# Altium PCB valix_PCB1.PcbDoc
Units mil, origin at the board's own origin, x right, y up, seen from the top; angles counter-clockwise.
Board outline 4000 x 1500 mil, 5 copper layers (Top Layer, Internal Plane 1, Signal Layer 1, Internal Plane 2, Bottom Layer), stack 37.051 mil thick; 142 components, 151 nets, 790 pads, 24 vias.
Unrouted connection lines stored in the file: 486.
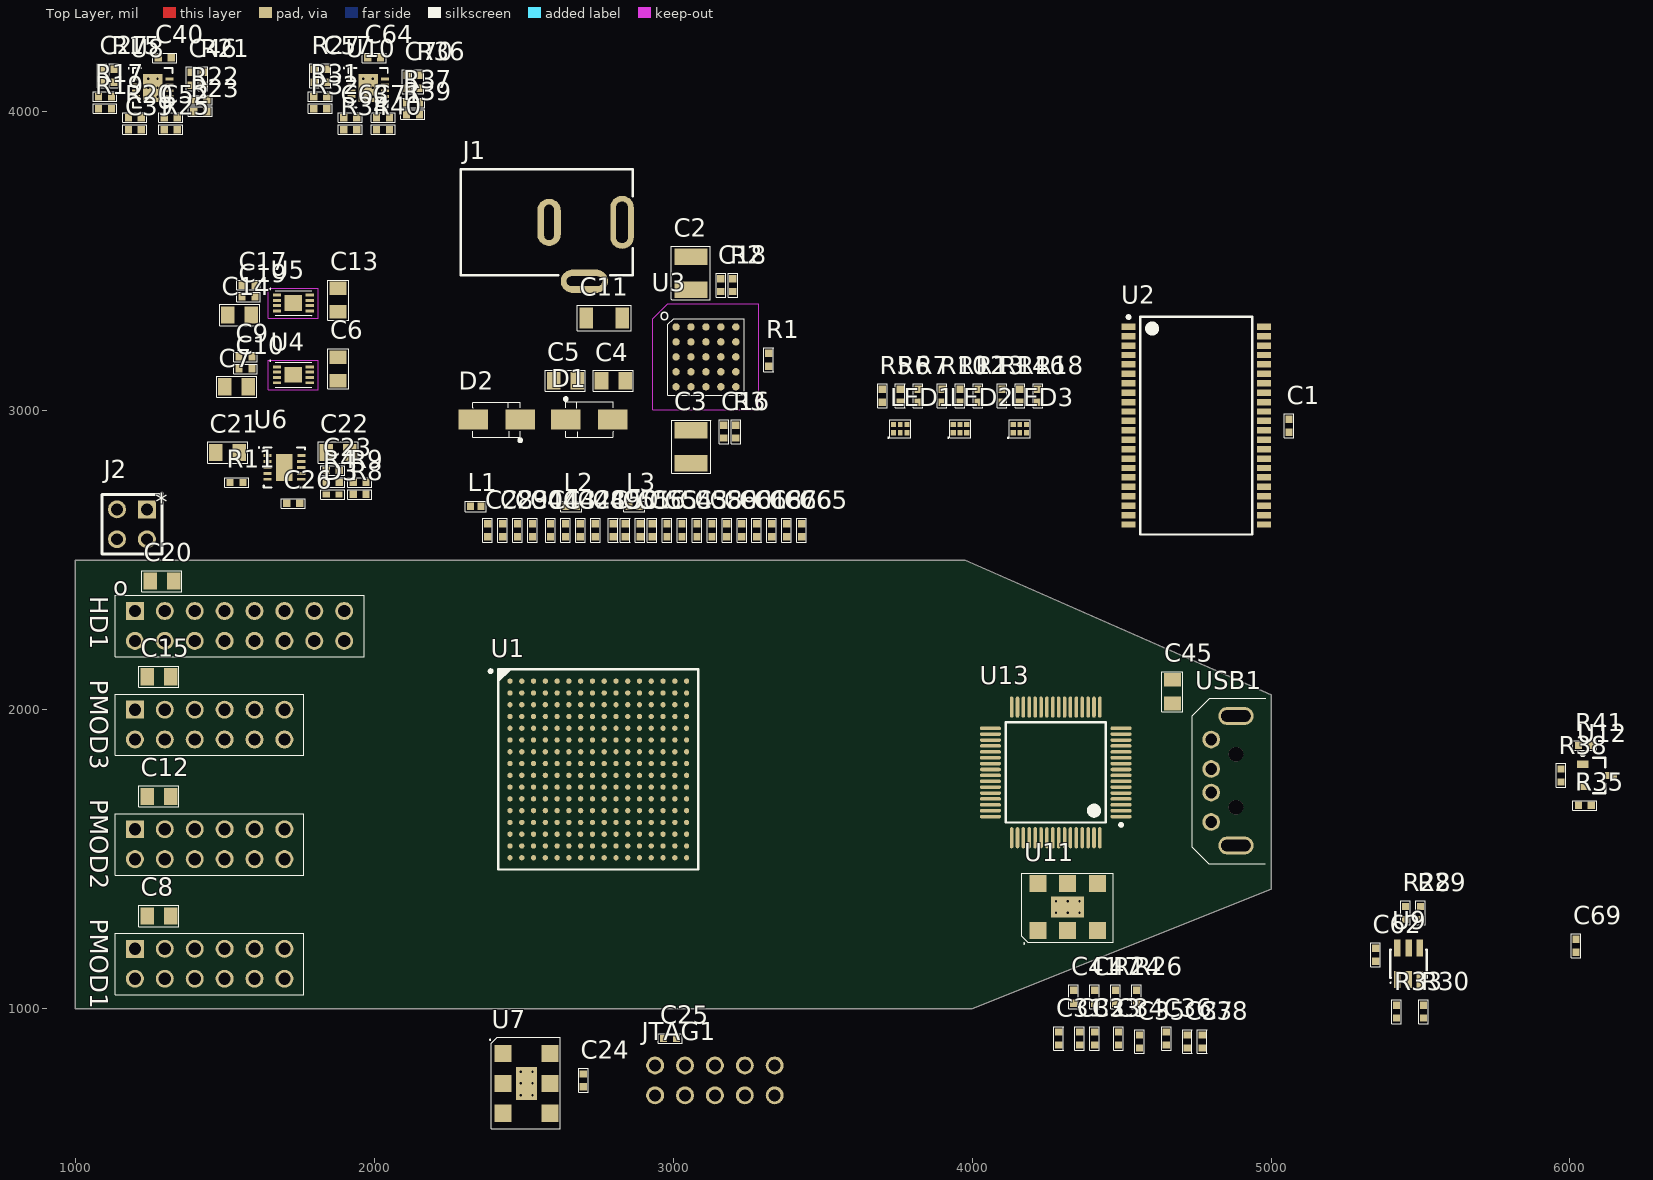
[diagram p0: Top Layer view]
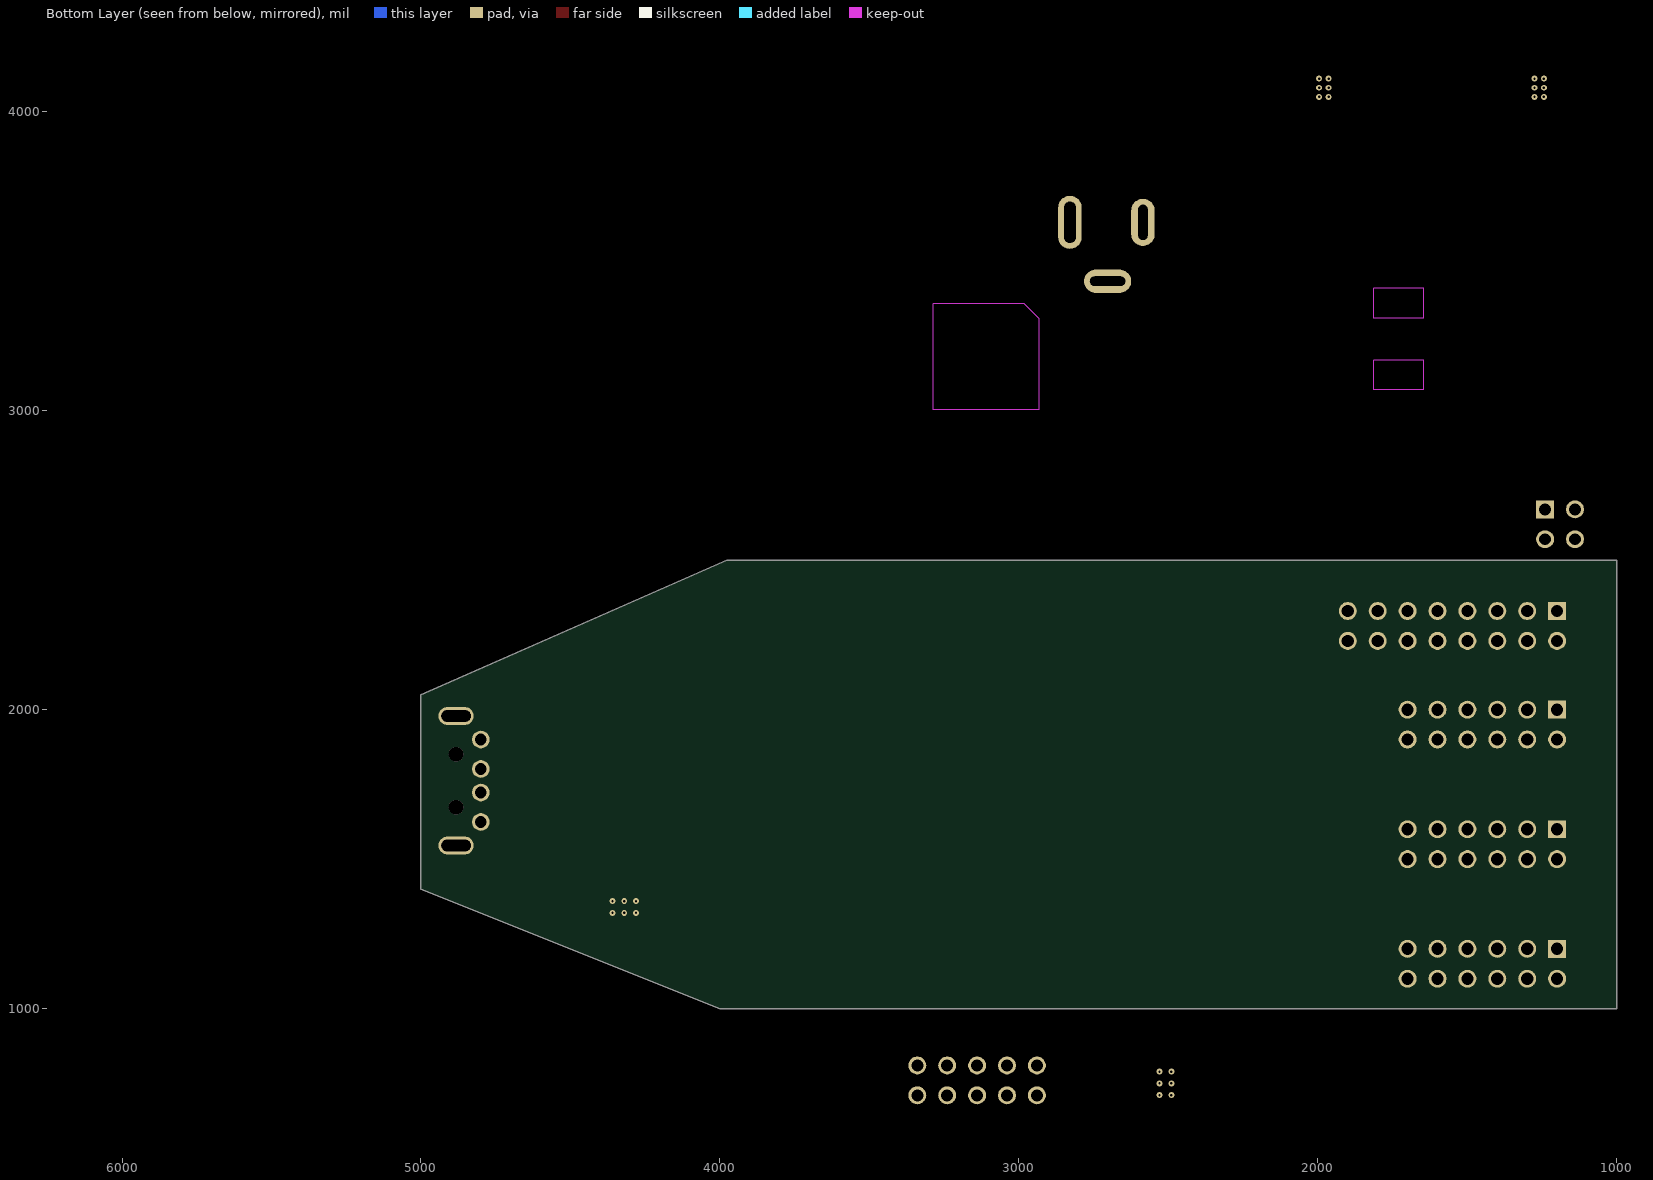
[diagram p1: Bottom Layer view, seen from below]
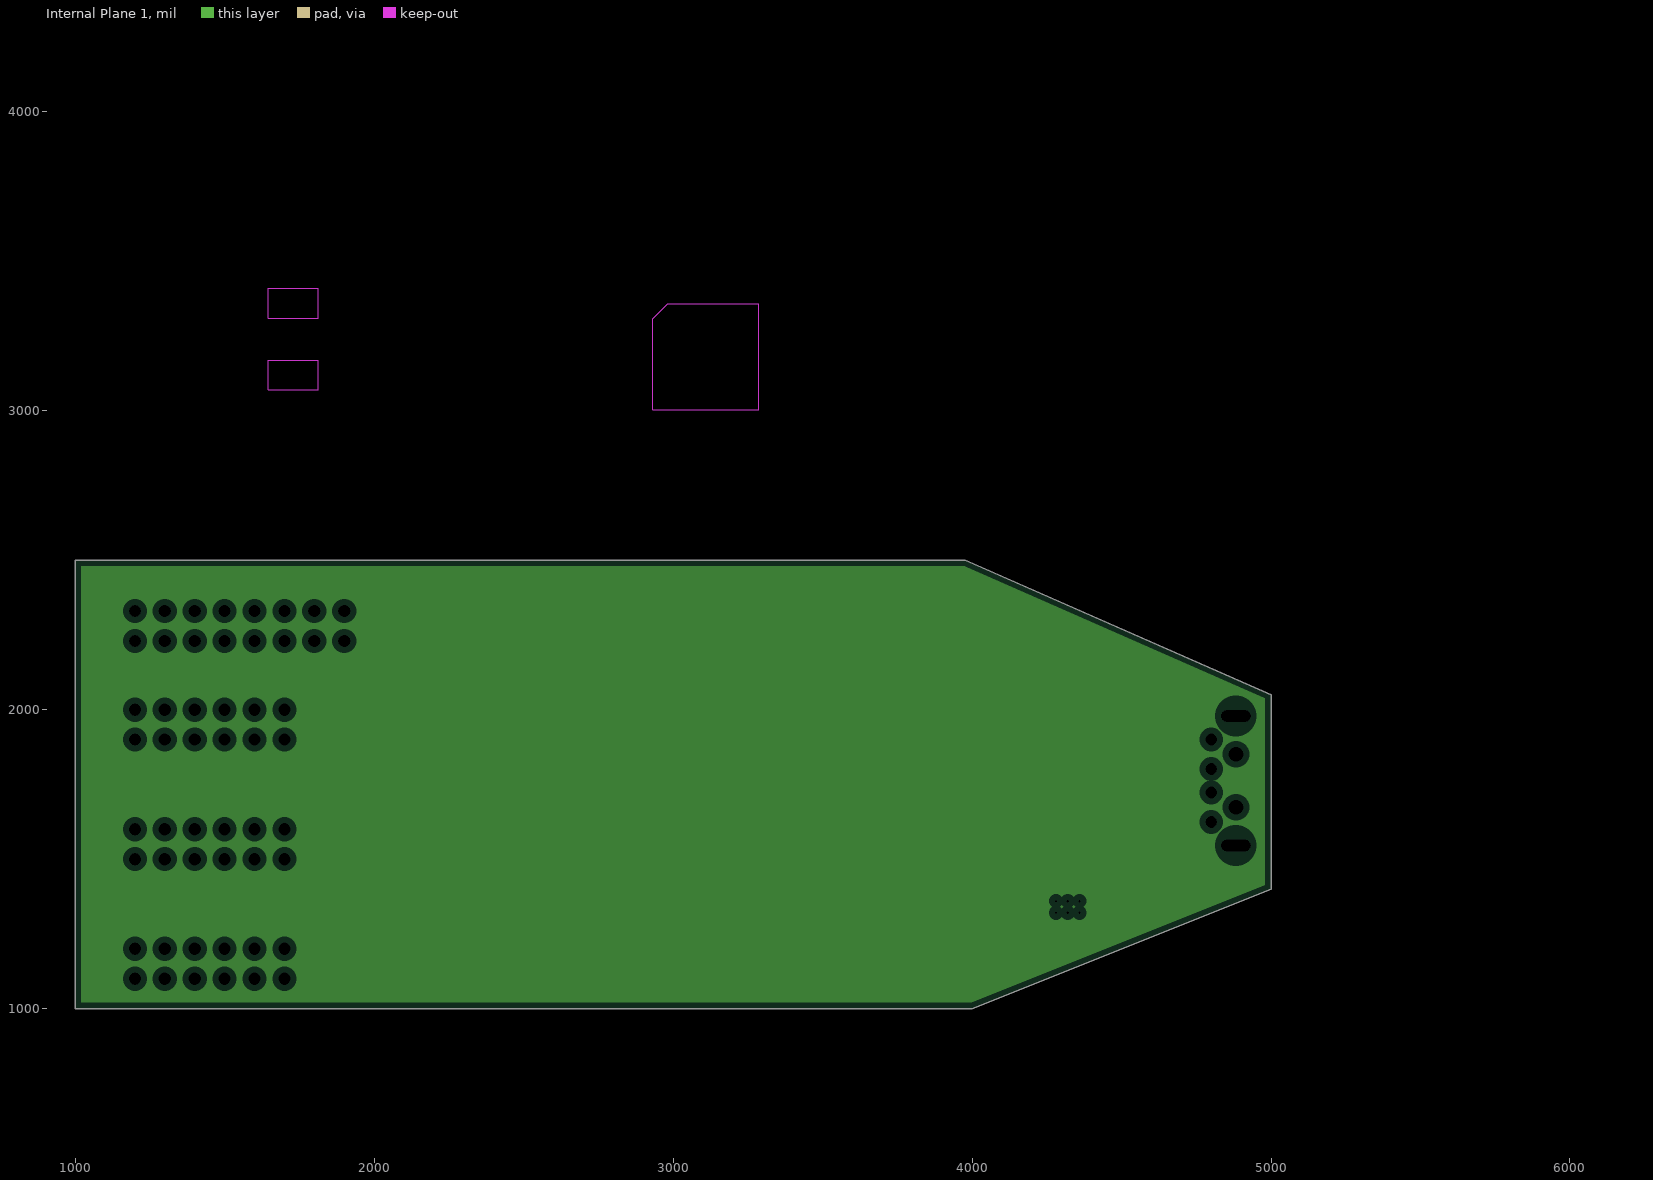
[diagram p2: Internal Plane 1, clearances drawn from the general rule]
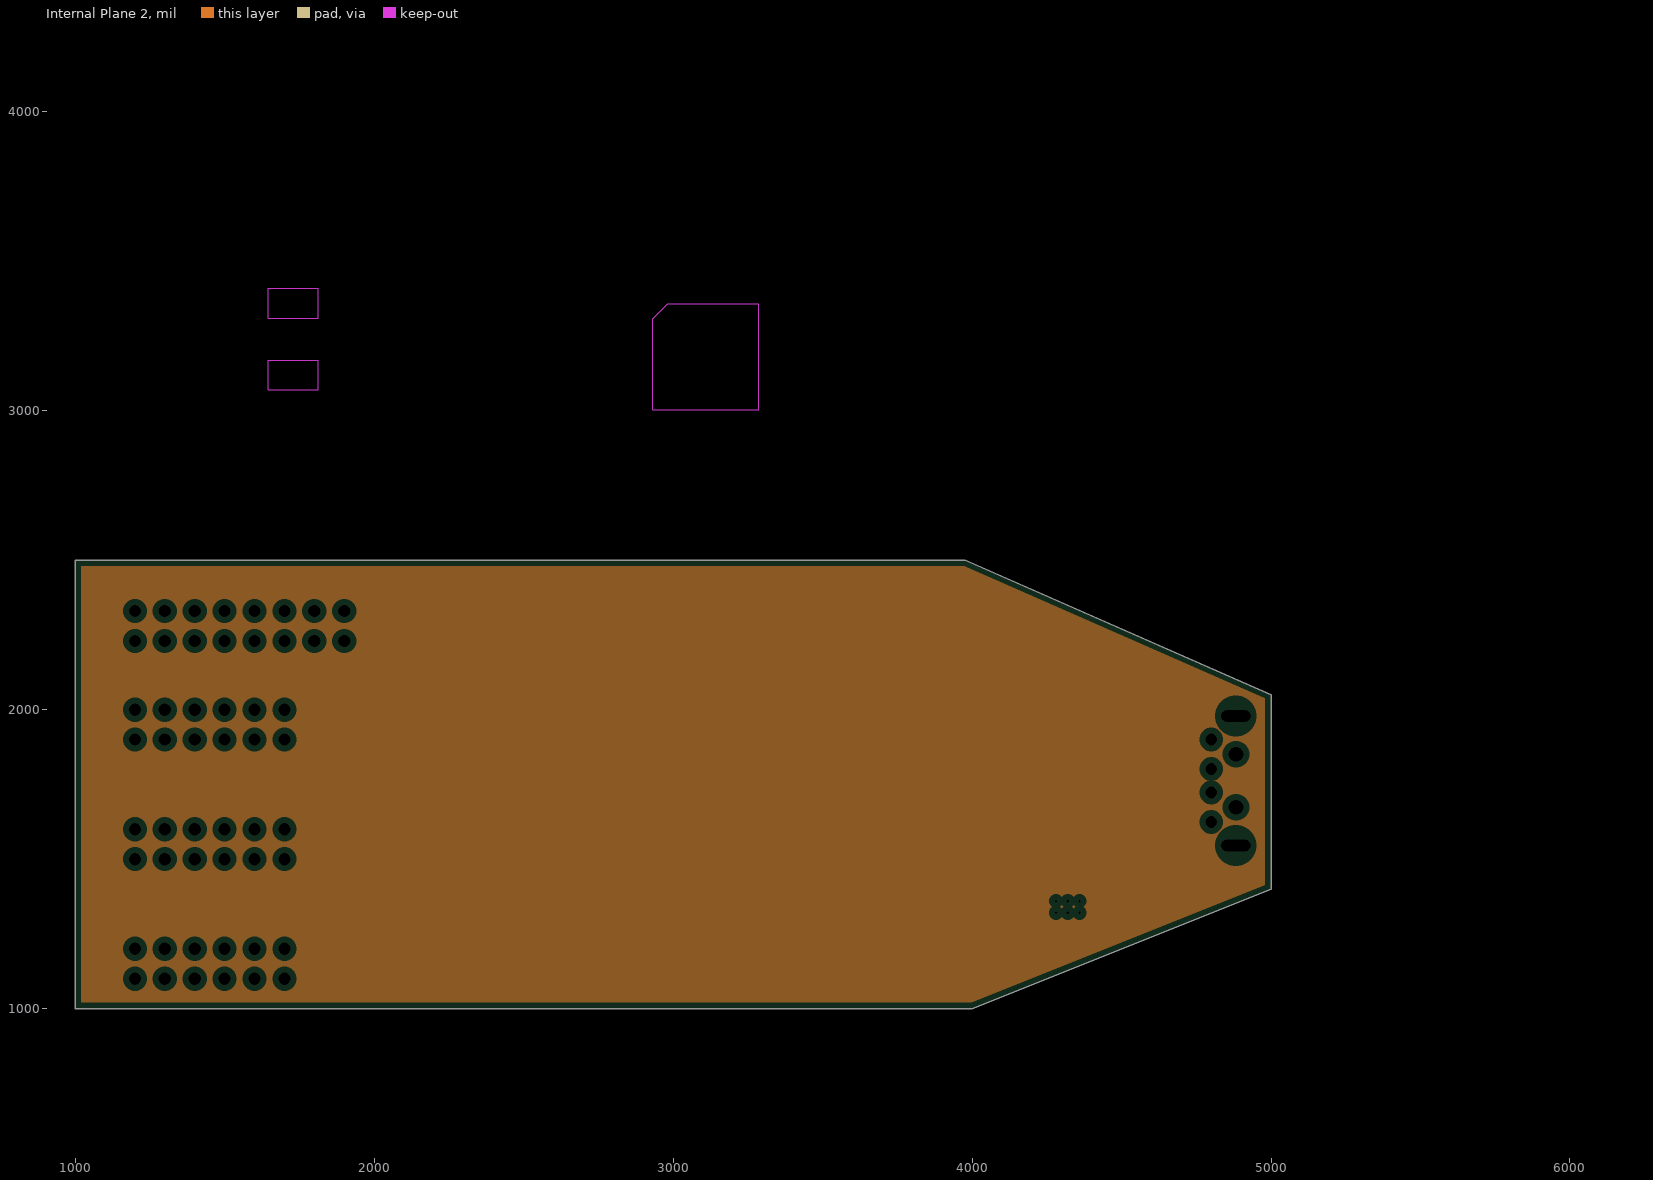
[diagram p3: Internal Plane 2, clearances drawn from the general rule]

## Layer stack, top to bottom
Top Solder: solder mask 0.4, Solder Resist, Dk 3.5
Top Layer: signal copper 1.4
Dielectric 1: core 10, FR-4, Dk 4.2
Internal Plane 1: plane copper 1.417
Dielectric 3: prepreg 5, Dk 4.2
Signal Layer 1: signal copper 1.417
Dielectric 4: core 10, Dk 4.2
Internal Plane 2: plane copper 1.417
Dielectric 2: prepreg 5, Dk 4.2
Bottom Layer: signal copper 1.4
Bottom Solder: solder mask 0.4, Solder Resist, Dk 3.5

## Board outline
1000,1000 1000,2500 3977.27,2500 5000,2050 5000,1400 4000,1000

## Design rules (kind name [scope] priority, off if disabled: settings)
Clearance [All] p1: gap=6
DiffPairsRouting [All] p1: maxlimit=10 minlimit=10 mostfreqgap=10 toplayer_minwidth=15 toplayer_maxwidth=15 toplayer_prefwidth=15 midlayer1_minwidth=15 midlayer1_maxwidth=15 midlayer1_prefwidth=15 bottomlayer_minwidth=15 bottomlayer_maxwidth=15 bottomlayer_prefwidth=15 maxuncoupledlength=500
PlaneClearance [All] p1: clearance=20
PlaneConnect [All] p1: planeconnectstyle=Relief reliefexpansion=20 reliefentries=4 reliefconductorwidth=10 reliefairgap=10
PolygonConnect [All] p1: connectstyle=Relief reliefconductorwidth=10 reliefentries=4 polygonreliefangle="90 Angle" airgapwidth=10
RoomDefinition VALIX_Font14 [InComponentClass('VALIX_Font14')] p1: confinementstyle=ConfineOut formatcopy=TRUE lockcomponents=FALSE outline 5640,2490 6350,2490 6350,4290 5640,4290
RoutingVias [All] p1: holewidth=28 width=50 viastyle="Through Hole" minholewidth=28 minwidth=50 maxholewidth=28 maxwidth=50
SolderMaskExpansion [All] p1: expansion=4
Width [All] p1: maxlimit=10 minlimit=10 preferedwidth=10
27 further rules are at their usual default settings.

## Classes and differential pairs
differential pair USB: +USB_P -USB_N

## Components (designator, comment, footprint, x,y, rotation, side; value= is the part's Value field where it differs from the comment)
C1 "Cap 1.0uF 6.3V 0402 X7R" CC0402_p56_TLH 5060,2950 r90 top
C2 "Cap 22uF 10V 1210 X7R" CC1210_H1p6_20151019 3060,3460 r90 top
C3 "Cap 22uF 10V 1210 X7R" CC1210_H1p6_20151019 3060,2880 r270 top
C4 "Cap 10uF 10V 0805 X7R" CC0805_p94H_TLH 2800,3100 r180 top
C5 "Cap 10uF 10V 0805 X7R" CC0805_p94H_TLH 2640,3100 r0 top
C6 "Cap 10uF 10V 0805 X7R" CC0805_p94H_TLH 1880,3140 r90 top
C7 "Cap 2.2uF 25V 0805 X7R" CC0805_p94H_TLH 1540,3080 r180 top
C8 "Cap 10uF 10V 0805 X7R" CC0805_p94H_TLH 1280,1310 r0 top
C9 "Cap 0.01uF 50V 0402 X7R" CC0402_p56_TLH 1570,3180 r180 top
C10 "Cap 0.01uF 50V 0402 X7R" CC0402_p56_TLH 1570,3140 r180 top
C11 "Cap 22uF 10V 1206 X7R" C1206 2770,3310 r180 top
C12 "Cap 10uF 10V 0805 X7R" CC0805_p94H_TLH 1280,1710 r0 top
C13 "Cap 10uF 10V 0805 X7R" CC0805_p94H_TLH 1880,3370 r90 top
C14 "Cap 2.2uF 25V 0805 X7R" CC0805_p94H_TLH 1550,3320 r180 top
C15 "Cap 10uF 10V 0805 X7R" CC0805_p94H_TLH 1280,2110 r0 top
C16 "Cap 0.1uF 50V 0402 X7R" CC0402_p56_TLH 3170,2930 r270 top
C17 "Cap 0.01uF 50V 0402 X7R" CC0402_p56_TLH 1580,3420 r180 top
C18 "Cap 0.1uF 50V 0402 X7R" CC0402_p56_TLH 3160,3420 r90 top
C19 "Cap 0.01uF 50V 0402 X7R" CC0402_p56_TLH 1580,3380 r180 top
C20 "Cap 2.2uF 25V 0805 X7R" CC0805_p94H_TLH 1290,2430 r0 top
C21 "Cap 10uF 10V 0805 X7R" CC0805_p94H_TLH 1510,2860 r180 top
C22 "Cap 10uF 10V 0805 X7R" CC0805_p94H_TLH 1880,2860 r0 top
C23 "Cap 0.001uF 50V 0402 X7R" CC0402_p56_TLH 1861.65,2800 r0 top
C24 "Cap 1.0uF 6.3V 0402 X7R" CC0402_p56_TLH 2700,760 r270 top
C25 "Cap 1.0uF 6.3V 0402 X7R" CC0402_p56_TLH 2990,900 r180 top
C26 "Cap 0.01uF 50V 0402 X7R" CC0402_p56_TLH 1730,2690 r180 top
C27 "Cap 47pF 50V 0402 NPO" CC0402_p56_TLH 1090,4120 r90 top
C28 "Cap 1.0uF 6.3V 0402 X7R" CC0402_p56_TLH 2380,2600 r90 top
C29 "Cap 1.0uF 6.3V 0402 X7R" CC0402_p56_TLH 2430,2600 r90 top
C30 "Cap 1.0uF 6.3V 0402 X7R" CC0402_p56_TLH 2480,2600 r90 top
C31 "Cap 1.0uF 6.3V 0402 X7R" CC0402_p56_TLH 4290,900 r90 top
C32 "Cap 1.0uF 6.3V 0402 X7R" CC0402_p56_TLH 4360,900 r90 top
C33 "Cap 1.0uF 6.3V 0402 X7R" CC0402_p56_TLH 4410,900 r90 top
C34 "Cap 1.0uF 6.3V 0402 X7R" CC0402_p56_TLH 4490,900 r90 top
C35 "Cap 1.0uF 6.3V 0402 X7R" CC0402_p56_TLH 4560,890 r90 top
C36 "Cap 1.0uF 6.3V 0402 X7R" CC0402_p56_TLH 4650,900 r90 top
C37 "Cap 1.0uF 6.3V 0402 X7R" CC0402_p56_TLH 4720,890 r90 top
C38 "Cap 1.0uF 6.3V 0402 X7R" CC0402_p56_TLH 4770,890 r90 top
C39 "Cap 47pF 50V 0402 NPO" CC0402_p56_TLH 1200,3940 r0 top
C40 "Cap 1.0uF 6.3V 0402 X7R" CC0402_p56_TLH 1300,4180 r180 top
C41 "Cap 1.0uF 6.3V 0402 X7R" CC0402_p56_TLH 4340,1040 r90 top
C42 "Cap 1.0uF 6.3V 0402 X7R" CC0402_p56_TLH 2640,2600 r90 top
C43 "Cap 1.0uF 6.3V 0402 X7R" CC0402_p56_TLH 2590,2600 r90 top
C44 "Cap 1.0uF 6.3V 0402 X7R" CC0402_p56_TLH 2530,2600 r90 top
C45 "Cap 10uF 10V 0805 X7R" CC0805_p94H_TLH 4670,2060 r90 top
C46 "Cap 47pF 50V 0402 NPO" CC0402_p56_TLH 1388.35,4110 r90 top
C47 "Cap 1.0uF 6.3V 0402 X7R" CC0402_p56_TLH 4410,1040 r90 top
C48 "Cap 1.0uF 6.3V 0402 X7R" CC0402_p56_TLH 2690,2600 r90 top
C49 "Cap 1.0uF 6.3V 0402 X7R" CC0402_p56_TLH 2740,2600 r90 top
C50 "Cap 1.0uF 6.3V 0402 X7R" CC0402_p56_TLH 2800,2600 r90 top
C51 "Cap 1.0uF 6.3V 0402 X7R" CC0402_p56_TLH 2840,2600 r90 top
C52 "Cap 47pF 50V 0402 NPO" CC0402_p56_TLH 1320,3980 r180 top
C53 "Cap 1.0uF 6.3V 0402 X7R" CC0402_p56_TLH 3030,2600 r90 top
C54 "Cap 1.0uF 6.3V 0402 X7R" CC0402_p56_TLH 2980,2600 r90 top
C55 "Cap 1.0uF 6.3V 0402 X7R" CC0402_p56_TLH 2930,2600 r90 top
C56 "Cap 1.0uF 6.3V 0402 X7R" CC0402_p56_TLH 2890,2600 r90 top
C57 "Cap 47pF 50V 0402 NPO" CC0402_p56_TLH 1840,4120 r90 top
C58 "Cap 1.0uF 6.3V 0402 X7R" CC0402_p56_TLH 3080,2600 r90 top
C59 "Cap 1.0uF 6.3V 0402 X7R" CC0402_p56_TLH 3130,2600 r90 top
C60 "Cap 1.0uF 6.3V 0402 X7R" CC0402_p56_TLH 3180,2600 r90 top
C61 "Cap 1.0uF 6.3V 0402 X7R" CC0402_p56_TLH 3230,2600 r90 top
C62 "Cap 1.0uF 6.3V 0402 X7R" CC0402_p56_TLH 5350,1180 r270 top
C63 "Cap 47pF 50V 0402 NPO" CC0402_p56_TLH 1920,3980 r0 top
C64 "Cap 1.0uF 6.3V 0402 X7R" CC0402_p56_TLH 2000,4180 r180 top
C65 "Cap 1.0uF 6.3V 0402 X7R" CC0402_p56_TLH 3430,2600 r90 top
C66 "Cap 1.0uF 6.3V 0402 X7R" CC0402_p56_TLH 3380,2600 r90 top
C67 "Cap 1.0uF 6.3V 0402 X7R" CC0402_p56_TLH 3330,2600 r90 top
C68 "Cap 1.0uF 6.3V 0402 X7R" CC0402_p56_TLH 3280,2600 r90 top
C69 "Cap 1.0uF 6.3V 0402 X7R" CC0402_p56_TLH 6020,1210 r270 top
C70 "Cap 47pF 50V 0402 NPO" CC0402_p56_TLH 2110,4100 r90 top
C71 "Cap 47pF 50V 0402 NPO" CC0402_p56_TLH 2030,3980 r180 top
D1 "Diode 40V 3A" SMA_SOICJ127P600-8N 2720,2970 r0 top
D2 "Diode 40V 3A" SMA_SOICJ127P600-8N 2410,2970 r180 top
D3 "SML-P11MT" "CC0402_p56_TLH - LED" 1861.65,2720 r0 top
HD1 "Conn Recept 8x2x0.1 TH SSW" "Conn Recept 8x2x8p35 0p1PH TH" 1450,2280 r180 top
J1 "Conn PWR 2.0 5A 24V TH Barrel" KLD-0202 2290,3630 r0 top
J2 "Header 2x2 100Pitch" Header_2x2x0p100e 1190,2620 r180 top
JTAG1 "Header 2x5 100Pitch" Header_2x5_100x100 3140,760 r0 top
L1 "FB 0.5A 80mohm 0402" Chip2PinSM127P600-8N_TLH20150921 2340,2680 r0 top
L2 "FB 0.5A 80mohm 0402" Chip2PinSM127P600-8N_TLH20150921 2660,2680 r0 top
L3 "FB 0.5A 80mohm 0402" Chip2PinSM127P600-8N_TLH20150921 2870,2680 r0 top
LED1 "LED RGB" LED_RGB_1p5x1p0x0p2_6pin_SON57P100X256N 3760,2940 r90 top
LED2 "LED RGB" LED_RGB_1p5x1p0x0p2_6pin_SON57P100X256N 3960,2940 r90 top
LED3 "LED RGB" LED_RGB_1p5x1p0x0p2_6pin_SON57P100X256N 4160,2940 r90 top
PMOD1 "Conn Recept 6x2x0.1 TH SSW" "Conn Recept 6x2x8p35 0p1PH TH" 1450,1150 r180 top
PMOD2 "Conn Recept 6x2x0.1 TH SSW" "Conn Recept 6x2x8p35 0p1PH TH" 1450,1550 r180 top
PMOD3 "Conn Recept 6x2x0.1 TH SSW" "Conn Recept 6x2x8p35 0p1PH TH" 1450,1950 r180 top
R1 "324K" CC0402_p56_TLH 3320,3170 r90 top
R2 "60.4K" CC0402_p56_TLH 3200,3420 r90 top
R3 "13.3K" CC0402_p56_TLH 3210,2930 r270 top
R4 "61.9K" CC0402_p56_TLH 1861.65,2760 r0 top
R5 "100" CC0402_p56_TLH 3700,3050 r90 top
R6 "392" CC0402_p56_TLH 3760,3050 r90 top
R7 "100" CC0402_p56_TLH 3820,3050 r90 top
R8 "715" CC0402_p56_TLH 1951.65,2720 r0 top
R9 "280K" CC0402_p56_TLH 1951.65,2760 r0 top
R10 "100" CC0402_p56_TLH 3900,3050 r90 top
R11 "150" CC0402_p56_TLH 1540,2760 r180 top
R12 "392" CC0402_p56_TLH 3960,3050 r90 top
R13 "100" CC0402_p56_TLH 4020,3050 r90 top
R14 "100" CC0402_p56_TLH 4100,3050 r90 top
R15 "1.0K" CC0402_p56_TLH 1130,4120 r90 top
R16 "392" CC0402_p56_TLH 4160,3050 r90 top
R17 "1.0K" CC0402_p56_TLH 1100,4050 r0 top
R18 "100" CC0402_p56_TLH 4220,3050 r90 top
R19 "1.0K" CC0402_p56_TLH 1100,4010 r0 top
R20 "1.0K" CC0402_p56_TLH 1200,3980 r0 top
R21 "1.0K" CC0402_p56_TLH 1428.35,4110 r90 top
R22 "1.0K" CC0402_p56_TLH 1418.35,4040 r180 top
R23 "1.0K" CC0402_p56_TLH 1418.35,4000 r180 top
R24 "2.21K" CC0402_p56_TLH 4480,1040 r90 top
R25 "1.0K" CC0402_p56_TLH 1320,3940 r180 top
R26 "10K" CC0402_p56_TLH 4550,1040 r90 top
R27 "1.0K" CC0402_p56_TLH 1800,4120 r90 top
R28 "10K" CC0402_p56_TLH 5450,1320 r270 top
R29 "10K" CC0402_p56_TLH 5500,1320 r270 top
R30 "10K" CC0402_p56_TLH 5510,990 r90 top
R31 "1.0K" CC0402_p56_TLH 1820,4050 r0 top
R32 "1.0K" CC0402_p56_TLH 1820,4010 r0 top
R33 "2.21K" CC0402_p56_TLH 5420,990 r90 top
R34 "1.0K" CC0402_p56_TLH 1920,3940 r0 top
R35 "150" CC0402_p56_TLH 6050,1680 r180 top
R36 "1.0K" CC0402_p56_TLH 2150,4100 r90 top
R37 "1.0K" CC0402_p56_TLH 2130,4030 r180 top
R38 "100" CC0402_p56_TLH 5970,1780 r90 top
R39 "1.0K" CC0402_p56_TLH 2130,3990 r180 top
R40 "1.0K" CC0402_p56_TLH 2030,3940 r180 top
R41 "12.4k" CC0402_p56_TLH 6050,1880 r0 top
U1 "10M08DA" BGA256C100P16X16_1700X1700X155 2750,1800 r0 top
U2 "MR0A16A" TSOP44_80P1180X120-44N 4750,2950 r0 top
U3 "LTM4622" LGA25C127P5X5_625X625X182_20131105 3110,3180 r0 top
U4 "LT3060EDC-2.5" DFN8_2x3_SON45P300X80_HS-9N 1730,3120 r0 top
U5 "LT3060EDC-1.2" DFN8_2x3_SON45P300X80_HS-9N 1730,3360 r0 top
U6 "LT3065-adj" DFN10_SON50P300X80_HS-11N_TLH_20151107 1700,2810 r0 top
U7 "50MHz" SON254P500X85_HS-7N_Oss 2510,750 r0 top
U8 "LT6014CDD" DFN8_3x3_SON50P300X80_HS-9N_20151201 1260,4080 r0 top
U9 "93LC46B" SO-G6/E2.4 5460,1150 r0 top
U10 "LT6014CDD" DFN8_3x3_SON50P300X80_HS-9N_20151201 1980,4080 r0 top
U11 "25MHz" SON254P500X85_HS-7N_Oss 4320,1340 r90 top
U12 "SPX432" SOT23_SOT95P245X112-3N_20151202 6090,1780 r0 top
U13 "IC FT2232HL-Tray" LQFP-64_N 4280,1790 r180 top
USB1 "Conn USB A TH RT" "Connector USB A 4Pin Plug RT" 4800,1900 r270 top

## Footprints (in the part's own frame and the unit in brackets; to place one, negate y for a bottom-side part, rotate by r counter-clockwise, add the part's x,y. Pads: shape width x height; smd on the part's side, far side on the other; paste and mask are expansions set on the pad)
BGA256C100P16X16_1700X1700X155 [mm] "BGA, 256-Leads, Body 17.00x17.00mmx1.55mm, Pitch 1.00mm"
  round 0.45 smd: A1(-7.5,7.5) A2(-6.5,7.5) A3(-5.5,7.5) A4(-4.5,7.5) A5(-3.5,7.5) A6(-2.5,7.5) A7(-1.5,7.5) A8(-0.5,7.5) A9(0.5,7.5) A10(1.5,7.5) A11(2.5,7.5) A12(3.5,7.5) A13(4.5,7.5) A14(5.5,7.5) A15(6.5,7.5) A16(7.5,7.5) B1(-7.5,6.5) B2(-6.5,6.5) B3(-5.5,6.5) B4(-4.5,6.5) B5(-3.5,6.5) B6(-2.5,6.5) B7(-1.5,6.5) B8(-0.5,6.5) B9(0.5,6.5) B10(1.5,6.5) B11(2.5,6.5) B12(3.5,6.5) B13(4.5,6.5) B14(5.5,6.5) B15(6.5,6.5) B16(7.5,6.5) C1(-7.5,5.5) C2(-6.5,5.5) C3(-5.5,5.5) C4(-4.5,5.5) C5(-3.5,5.5) C6(-2.5,5.5) C7(-1.5,5.5) C8(-0.5,5.5) C9(0.5,5.5) C10(1.5,5.5) C11(2.5,5.5) C12(3.5,5.5) C13(4.5,5.5) C14(5.5,5.5) C15(6.5,5.5) C16(7.5,5.5) D1(-7.5,4.5) D2(-6.5,4.5) D3(-5.5,4.5) D4(-4.5,4.5) D5(-3.5,4.5) D6(-2.5,4.5) D7(-1.5,4.5) D8(-0.5,4.5) D9(0.5,4.5) D10(1.5,4.5) D11(2.5,4.5) D12(3.5,4.5) D13(4.5,4.5) D14(5.5,4.5) D15(6.5,4.5) D16(7.5,4.5) E1(-7.5,3.5) E2(-6.5,3.5) E3(-5.5,3.5) E4(-4.5,3.5) E5(-3.5,3.5) E6(-2.5,3.5) E7(-1.5,3.5) E8(-0.5,3.5) E9(0.5,3.5) E10(1.5,3.5) E11(2.5,3.5) E12(3.5,3.5) E13(4.5,3.5) E14(5.5,3.5) E15(6.5,3.5) E16(7.5,3.5) F1(-7.5,2.5) F2(-6.5,2.5) F3(-5.5,2.5) F4(-4.5,2.5) F5(-3.5,2.5) F6(-2.5,2.5) F7(-1.5,2.5) F8(-0.5,2.5) F9(0.5,2.5) F10(1.5,2.5) F11(2.5,2.5) F12(3.5,2.5) F13(4.5,2.5) F14(5.5,2.5) F15(6.5,2.5) F16(7.5,2.5) G1(-7.5,1.5) G2(-6.5,1.5) G3(-5.5,1.5) G4(-4.5,1.5) G5(-3.5,1.5) G6(-2.5,1.5) G7(-1.5,1.5) G8(-0.5,1.5) G9(0.5,1.5) G10(1.5,1.5) G11(2.5,1.5) G12(3.5,1.5) G13(4.5,1.5) G14(5.5,1.5) G15(6.5,1.5) G16(7.5,1.5) H1(-7.5,0.5) H2(-6.5,0.5) H3(-5.5,0.5) H4(-4.5,0.5) H5(-3.5,0.5) H6(-2.5,0.5) H7(-1.5,0.5) H8(-0.5,0.5) H9(0.5,0.5) H10(1.5,0.5) H11(2.5,0.5) H12(3.5,0.5) H13(4.5,0.5) H14(5.5,0.5) H15(6.5,0.5) H16(7.5,0.5) J1(-7.5,-0.5) J2(-6.5,-0.5) J3(-5.5,-0.5) J4(-4.5,-0.5) J5(-3.5,-0.5) J6(-2.5,-0.5) J7(-1.5,-0.5) J8(-0.5,-0.5) J9(0.5,-0.5) J10(1.5,-0.5) J11(2.5,-0.5) J12(3.5,-0.5) J13(4.5,-0.5) J14(5.5,-0.5) J15(6.5,-0.5) J16(7.5,-0.5) K1(-7.5,-1.5) K2(-6.5,-1.5) K3(-5.5,-1.5) K4(-4.5,-1.5) K5(-3.5,-1.5) K6(-2.5,-1.5) K7(-1.5,-1.5) K8(-0.5,-1.5) K9(0.5,-1.5) K10(1.5,-1.5) K11(2.5,-1.5) K12(3.5,-1.5) K13(4.5,-1.5) K14(5.5,-1.5) K15(6.5,-1.5) K16(7.5,-1.5) L1(-7.5,-2.5) L2(-6.5,-2.5) L3(-5.5,-2.5) L4(-4.5,-2.5) L5(-3.5,-2.5) L6(-2.5,-2.5) L7(-1.5,-2.5) L8(-0.5,-2.5) L9(0.5,-2.5) L10(1.5,-2.5) L11(2.5,-2.5) L12(3.5,-2.5) L13(4.5,-2.5) L14(5.5,-2.5) L15(6.5,-2.5) L16(7.5,-2.5) M1(-7.5,-3.5) M2(-6.5,-3.5) M3(-5.5,-3.5) M4(-4.5,-3.5) M5(-3.5,-3.5) M6(-2.5,-3.5) M7(-1.5,-3.5) M8(-0.5,-3.5) M9(0.5,-3.5) M10(1.5,-3.5) M11(2.5,-3.5) M12(3.5,-3.5) M13(4.5,-3.5) M14(5.5,-3.5) M15(6.5,-3.5) M16(7.5,-3.5) N1(-7.5,-4.5) N2(-6.5,-4.5) N3(-5.5,-4.5) N4(-4.5,-4.5) N5(-3.5,-4.5) N6(-2.5,-4.5) N7(-1.5,-4.5) N8(-0.5,-4.5) N9(0.5,-4.5) N10(1.5,-4.5) N11(2.5,-4.5) N12(3.5,-4.5) N13(4.5,-4.5) N14(5.5,-4.5) N15(6.5,-4.5) N16(7.5,-4.5) P1(-7.5,-5.5) P2(-6.5,-5.5) P3(-5.5,-5.5) P4(-4.5,-5.5) P5(-3.5,-5.5) P6(-2.5,-5.5) P7(-1.5,-5.5) P8(-0.5,-5.5) P9(0.5,-5.5) P10(1.5,-5.5) P11(2.5,-5.5) P12(3.5,-5.5) P13(4.5,-5.5) P14(5.5,-5.5) P15(6.5,-5.5) P16(7.5,-5.5) R1(-7.5,-6.5) R2(-6.5,-6.5) R3(-5.5,-6.5) R4(-4.5,-6.5) R5(-3.5,-6.5) R6(-2.5,-6.5) R7(-1.5,-6.5) R8(-0.5,-6.5) R9(0.5,-6.5) R10(1.5,-6.5) R11(2.5,-6.5) R12(3.5,-6.5) R13(4.5,-6.5) R14(5.5,-6.5) R15(6.5,-6.5) R16(7.5,-6.5) T1(-7.5,-7.5) T2(-6.5,-7.5) T3(-5.5,-7.5) T4(-4.5,-7.5) T5(-3.5,-7.5) T6(-2.5,-7.5) T7(-1.5,-7.5) T8(-0.5,-7.5) T9(0.5,-7.5) T10(1.5,-7.5) T11(2.5,-7.5) T12(3.5,-7.5) T13(4.5,-7.5) T14(5.5,-7.5) T15(6.5,-7.5) T16(7.5,-7.5)
  silkscreen extent -9.27,-8.5 8.5,8.5, body extent -8.5,-8.5 8.5,8.5, height 1.55
C1206 [mm]
  rect 1.15x1.8 smd: 1(-1.524,0) 2(1.524,0)
  silkscreen extent -2.3,-1.1 2.3,1.1, body extent -1.6,-0.8 1.6,0.8, height 0.55
CC0402_p56_TLH [mm] "Chip Capacitor, 2-Leads, Body 1.0x0.50x0.56mm, IPC Low Density"
  rect 0.62x0.62 smd: 1(-0.55,0) 2(0.55,0)
  silkscreen extent -1.02,-0.41 1.02,0.41, body extent -0.55,-0.3 0.55,0.3, height 0.56
"CC0402_p56_TLH - LED" [mm] "LED, 2-Leads, Body 1.0x0.50x0.56mm, IPC Low Density"
  rect 0.6x0.5 smd: 1(-0.55,0) 2(0.55,0)
  silkscreen extent -1.02,-0.41 1.02,0.41, body extent -0.5,-0.25 0.5,0.25, height 0.16
CC0805_p94H_TLH [mm] "Cap 0805 0p94 high"
  rect 1.15x1.45 smd: 1(-1,0) 2(1,0)
  silkscreen extent -1.7,-0.9 1.7,0.9, body extent -1.11,-0.72 1.1,0.72, height 0.94
CC1210_H1p6_20151019 [mm] "CC1210H1.6 Chip2PinSM127P600-8N"
  rect 1.4x2.8 smd: 1(-1.4,0) 2(1.4,0)
  silkscreen extent -2.25,-1.63 2.27,1.68, body extent -1.6,-1.35 1.6,1.35, height 1.7
Chip2PinSM127P600-8N_TLH20150921 [mm] "Chip 0402 inductor"
  rect 0.59x0.62 smd: 1(-0.455,0) 2(0.455,0)
  silkscreen extent -0.9,-0.45 0.9,0.45, body extent -0.53,-0.28 0.53,0.27, height 0.55
"Conn Recept 6x2x8p35 0p1PH TH" [mil] "Conn Recept 6x2x8p35 0p1PH TH Samtec SSW"
  rect 60x60 hole 40.94: 1(250,-50)
  round 60 hole 40.94: 2(250,50) 3(150,-50) 4(150,50) 5(50,-50) 6(50,50) 7(-50,-50) 8(-50,50) 9(-150,-50) 10(-150,50) 11(-250,-50) 12(-250,50)
  silkscreen extent -315,-101 315,103, body extent -310,-97 310,98, height 335
"Conn Recept 8x2x8p35 0p1PH TH" [mil] "Conn Recept 8x2x8p35 0p1PH TH Samtec SSW"
  rect 60x60 hole 40.94: 1(250,-50)
  round 60 hole 40.94: 2(250,50) 3(150,-50) 4(150,50) 5(50,-50) 6(50,50) 7(-50,-50) 8(-50,50) 9(-150,-50) 10(-150,50) 11(-250,-50) 12(-250,50) 13(-350,-50) 14(-350,50) 15(-450,-50) 16(-450,50)
  silkscreen extent -517,-103 315,103, body extent -510,-97 310,98, height 335
"Connector USB A 4Pin Plug RT" [mm] "Connector USB A 4Pin Plug RT"
  round 1.25 hole 1.25 unplated: 0(1.25,2.1) 0(5.75,2.1)
  round 1.5 hole 1: 1(0,0) 2(2.5,0) 3(4.5,0) 4(7,0)
  oval 1.524x3 hole 1 slot 2.5 at 90 deg: G1(-2,2.1) G2(9,2.1)
  silkscreen extent -3.5,-1.6 10.55,4.65, body extent -2.79,-0.11 9.9,19.92, height 4.51
DFN8_2x3_SON45P300X80_HS-9N [mm] "SON, 8-Leads, Body 2.00x3.00mm, Pitch 0.45mm, Thermal Pad 2.38x1.49mm, IPC Medium Density"
  rect 0.7x0.25 smd: 1(-1.4,0.675) 2(-1.4,0.225) 3(-1.4,-0.225) 4(-1.4,-0.675) 5(1.4,-0.675) 6(1.4,-0.225) 7(1.4,0.225) 8(1.4,0.675)
  rect 1.5x1.35 smd: 9(0,0)
  Keep-Out Layer lines w0.05: -2.15,-1.275 -2.15,1.25 2.125,1.25 2.125,-1.275 -2.15,-1.275
  silkscreen extent -2,-1.07 1.55,1.25, body extent -1.55,-1.05 1.55,1.05, height 0.8
DFN8_3x3_SON50P300X80_HS-9N_20151201 [mm] "SON, 8-Leads, Body 3.00x3.00mm, Pitch 0.50mm, Thermal Pad 2.80x1.80mm, IPC Medium Density"
  rect 0.675x0.25 smd: 1(-1.425,0.75) 2(-1.425,0.25) 3(-1.425,-0.25) 4(-1.425,-0.75) 5(1.425,-0.75) 6(1.425,-0.25) 7(1.425,0.25) 8(1.425,0.75)
  rect 1.65x2.38 smd: 9(0,0)
  silkscreen extent -2.1,-1.67 1.67,1.72, body extent -1.55,-1.55 1.55,1.55, height 0.79
DFN10_SON50P300X80_HS-11N_TLH_20151107 [mm] "SON, 10-Leads, Body 3.00x3.00mm, Pitch 0.50mm, Thermal Pad 2.38x1.49mm, IPC Medium Density"
  rect 0.7x0.25 smd: 1(-1.425,1) 2(-1.425,0.5) 3(-1.425,0) 4(-1.425,-0.5) 5(-1.425,-1) 6(1.425,-1) 7(1.425,-0.5) 8(1.425,0) 9(1.425,0.5) 10(1.45,1)
  rect 1.4x2.3 smd: 11(0,0)
  silkscreen extent -2.2,-1.7 1.75,1.75, body extent -1.6,-1.55 1.5,1.55, height 0.8
Header_2x2x0p100e [mil] "Header 2x2x100mil Samtec TSW standard"
  rect 60x60 hole 40: 1(-50,-50)
  round 60 hole 40: 2(-50,50) 3(50,-50) 4(50,50)
  silkscreen extent -100,-105 100,100, body extent -100,-100 100,100, height 374
Header_2x5_100x100 [mil] "Header 2x5 100x100 Samtec TSW standard"
  round 60 hole 40: 1(-200,-50) 2(-200,50) 3(-100,-50) 4(-100,50) 5(0,-50) 6(0,50) 7(100,-50) 8(100,50) 9(200,-50) 10(200,50)
  body extent -250,-100 250,100, height 621
KLD-0202 [mm] "DC Power Jack, 2.5mm, KLD Series, PCB Mount"
  oval 2x4.5 hole 1 slot 3.5 at 90 deg: 1(13.7,0)
  oval 2x4 hole 0.8 slot 3 at 90 deg: 2(7.5,0)
  oval 4x2 hole 0.8 slot 3 at 0 deg: 3(10.5,-5)
  silkscreen extent 0,-4.5 14.6,4.5, body extent -0.1,-5.28 14.35,4.27, height 11
LED_RGB_1p5x1p0x0p2_6pin_SON57P100X256N [mm] "SON, 6-Leads, Body 1.50x1.00mm, Pitch 0.57mm, IPC Medium Density"
  rect 0.45x0.45 smd: 1(-0.35,0.57) 3(-0.35,-0.57) 4(0.35,-0.57) 6(0.35,0.57)
  rect 0.45x0.4 smd: 2(-0.35,0) 5(0.35,0)
  silkscreen extent -0.84,-0.89 0.76,1.06, body extent -0.53,-0.76 0.53,0.75, height 0.25
LGA25C127P5X5_625X625X182_20131105 [mm] "LGA, 25-Leads, Body 6.25x6.25mmx1.82mm, Pitch 1.27mm"
  round 0.63 smd: A1(-2.54,2.54) A2(-1.27,2.54) A3(0,2.54) A4(1.27,2.54) A5(2.54,2.54) B1(-2.54,1.27) B2(-1.27,1.27) B3(0,1.27) B4(1.27,1.27) B5(2.54,1.27) C1(-2.54,0) C2(-1.27,0) C3(0,0) C4(1.27,0) C5(2.54,0) D1(-2.54,-1.27) D2(-1.27,-1.27) D3(0,-1.27) D4(1.27,-1.27) D5(2.54,-1.27) E1(-2.54,-2.54) E2(-1.27,-2.54) E3(0,-2.54) E4(1.27,-2.54) E5(2.54,-2.54)
  Keep-Out Layer lines w0.1: -4.5,-4.5 -4.5,3.25 -3.25,4.5 4.5,4.5 4.5,-4.5 3.25,-4.5 -4.5,-4.5
  silkscreen extent -3.25,-3.25 3.25,3.25, body extent -3.13,-3.13 3.13,3.13, height 1.82
LQFP-64_N [mm] "Thin QFP, 64-Leads, Body 10x10mm, Pitch 0.5mm, IPC Medium Density"
  oval 1.8x0.3 smd: 1(-5.55,3.75) 2(-5.55,3.25) 3(-5.55,2.75) 4(-5.55,2.25) 5(-5.55,1.75) 6(-5.55,1.25) 7(-5.55,0.75) 8(-5.55,0.25) 9(-5.55,-0.25) 10(-5.55,-0.75) 11(-5.55,-1.25) 12(-5.55,-1.75) 13(-5.55,-2.25) 14(-5.55,-2.75) 15(-5.55,-3.25) 16(-5.55,-3.75) 33(5.55,-3.75) 34(5.55,-3.25) 35(5.55,-2.75) 36(5.55,-2.25) 37(5.55,-1.75) 38(5.55,-1.25) 39(5.55,-0.75) 40(5.55,-0.25) 41(5.55,0.25) 42(5.55,0.75) 43(5.55,1.25) 44(5.55,1.75) 45(5.55,2.25) 46(5.55,2.75) 47(5.55,3.25) 48(5.55,3.75)
  oval 0.3x1.8 smd: 17(-3.75,-5.55) 18(-3.25,-5.55) 19(-2.75,-5.55) 20(-2.25,-5.55) 21(-1.75,-5.55) 22(-1.25,-5.55) 23(-0.75,-5.55) 24(-0.25,-5.55) 25(0.25,-5.55) 26(0.75,-5.55) 27(1.25,-5.55) 28(1.75,-5.55) 29(2.25,-5.55) 30(2.75,-5.55) 31(3.25,-5.55) 32(3.75,-5.55) 49(3.75,5.55) 50(3.25,5.55) 51(2.75,5.55) 52(2.25,5.55) 53(1.75,5.55) 54(1.25,5.55) 55(0.75,5.55) 56(0.25,5.55) 57(-0.25,5.55) 58(-0.75,5.55) 59(-1.25,5.55) 60(-1.75,5.55) 61(-2.25,5.55) 62(-2.75,5.55) 63(-3.25,5.55) 64(-3.75,5.55)
  silkscreen extent -5.68,-4.25 4.25,4.57, body extent -5,-5 5,5, height 1.6
SMA_SOICJ127P600-8N [mm] "SMA Diode"
  rect 2.5x1.7 smd: 1(-2,0) 2(2,0)
  silkscreen extent -2.12,-1.47 2.02,1.87, body extent -2.53,-1.46 2.75,1.46, height 2.41
SO-G6/E2.4 [mm] "Small Outline; 6 Leads; Body 3.6 x 3.6 mm, inc. leads (LxW max)"
  rect 0.55x1.45 smd: 1(-0.95,-1.35) 2(0,-1.35) 3(0.95,-1.35) 4(0.95,1.35) 5(0,1.35) 6(-0.95,1.35)
  silkscreen extent -1.57,-1.65 1.55,1.2, body extent -1.46,-1.62 1.46,1.22, height 1.12
SON254P500X85_HS-7N_Oss [mm] "SON, 6-Leads, Body 7.00x5.00mm, Pitch 2.54mm, Thermal Pad 2.80x1.80mm, IPC Medium Density"
  rect 1.45x1.45 smd: 1(-2,2.54) 2(-2,0) 3(-2,-2.54) 4(2,-2.54) 5(2,0) 6(2,2.54)
  rect 1.8x2.8 smd: 7(0,0)
  silkscreen extent -3.15,-3.85 2.88,3.9, body extent -2.55,-3.55 2.55,3.55, height 0.85
SOT23_SOT95P245X112-3N_20151202 [mm] "SOT23, 3-Leads, Body 2.92x2.45mm, Pitch 0.95mm, IPC Medium Density"
  rect 1x0.6 smd: 1(-1.2,0.95) 2(-1.2,-0.95) 3(1.2,0)
  silkscreen extent -1.32,-1.5 0.7,1.92, body extent -1.34,-1.53 1.49,1.52, height 1.2
TSOP44_80P1180X120-44N [mm] "TSOP, 44-Leads, Body 18.41x10.16mm, Pitch 0.80mm, IPC Medium Density"
  rect 1.2x0.55 smd: 1(-5.75,8.4) 2(-5.75,7.6) 3(-5.75,6.8) 4(-5.75,6) 5(-5.75,5.2) 6(-5.75,4.4) 7(-5.75,3.6) 8(-5.75,2.8) 9(-5.75,2) 10(-5.75,1.2) 11(-5.75,0.4) 12(-5.75,-0.4) 13(-5.75,-1.2) 14(-5.75,-2) 15(-5.75,-2.8) 16(-5.75,-3.6) 17(-5.75,-4.4) 18(-5.75,-5.2) 19(-5.75,-6) 20(-5.75,-6.8) 21(-5.75,-7.6) 22(-5.75,-8.4) 23(5.75,-8.4) 24(5.75,-7.6) 25(5.75,-6.8) 26(5.75,-6) 27(5.75,-5.2) 28(5.75,-4.4) 29(5.75,-3.6) 30(5.75,-2.8) 31(5.75,-2) 32(5.75,-1.2) 33(5.75,-0.4) 34(5.75,0.4) 35(5.75,1.2) 36(5.75,2) 37(5.75,2.8) 38(5.75,3.6) 39(5.75,4.4) 40(5.75,5.2) 41(5.75,6) 42(5.75,6.8) 43(5.75,7.6) 44(5.75,8.4)
  silkscreen extent -5.87,-9.25 4.75,9.35, body extent -5.15,-9.25 5.15,9.25, height 1.2

## Part data
C1 C24 C25 C28 C29 C30 C31 C32 C33 C34 C35 C36 C37 C38 C40 C41 C42 C43 C44 C47 C48 C49 C50 C51 C53 C54 C55 C56 C58 C59 C60 C61 C62 C64 C65 C66 C67 C68 C69: "Capacitor 1.0uF 6.3V 10% 0402 X7R"
C2 C3: library part "Cap 22uF 25V 1210 X7R", "Capacitor 22uF 25V 10% 1210 X7R"
C4 C5 C6 C8 C12 C13 C15 C21 C22 C45: "Capacitor 10uF 10V 10% 0805 X7R"
C7 C14 C20: library part "Cap 2.2uF 25V X7R 0805", "Capacitor 2.2uF 25V 5% 0805 X7R"
C9 C10 C17 C19 C26: "Capacitor 0.01uF 50V10% 0402 X7R"
C11: "Capacitor 22uF 10V 10% 1206 X7R"
C16 C18: "Capacitor 0.1uF 50V 10% 0402 X7R"
C23: "Capacitor 0.001uF 50V10% 0402 X7R"
C27 C39 C46 C52 C57 C63 C70 C71: "Capacitor 47pF 50V 10% 0402 NPO"
D1 D2: library part "Diode 40V 3A SMA CDBA340L-HF", "Diode 40V 3A SMA CDBA340L-HF"
D3: library part "LED Green 0402", "LED Green 0402"
HD1: library part "Conn Recept 8x2x0.1 TH SSW_1_1"
J2: library part "Header 2x2x100 Samtec TSW-07", "Header 2x2x100pitch Pin TSW"
JTAG1: library part "Header 2x5 100PH SamtecTSW_2", "Header 2x5x100pitch Pin TSW"
L1 L2 L3: library part "FBead 500mA 80mohm 0402", "Ferrite Bead 500mA 80mohm 0402"
LED1 LED2 LED3: library part "LED RGB 6pin SMT 0404", "LED RGB 6pin SMT 0404"
PMOD1 PMOD2 PMOD3: library part "Conn Recept 6x2x0.1 TH SSW_1_1"
R1: library part "Res 324K 60mW 1% 0402", "Resistor 324K 60mW 1% 0402 ThickFilm"
R2: library part "Res 60.4K 60mW 1% 0402", "Resistor 60.4K 60mW 1% 0402 ThickFilm"
R3: library part "Res 13.3K 60mW 1% 0402", "Resistor 13.3K 60mW 1% 0402 ThickFilm"
R4: library part "Res 61.9K 60mW 1% 0402", "Resistor 61.9K 60mW 1% 0402 ThickFilm"
R5 R7 R10 R13 R14 R18 R38: library part "Res 100 60mW 1% 0402", "Resistor 100 60mW 1% 0402 ThickFilm"
R6 R12 R16: library part "Res 392 60mW 1% 0402", "Resistor 392 60mW 1% 0402 ThickFilm"
R8: library part "Res 715 60mW 1% 0402", "Resistor 715 60mW 1% 0402 ThickFilm"
R9: library part "Res 280K 60mW 1% 0402", "Resistor 280K 60mW 1% 0402 ThickFilm"
R11 R35: library part "Res 150 60mW 1% 0402", "Resistor 150 60mW 1% 0402 ThickFilm"
R15 R17 R19 R20 R21 R22 R23 R25 R27 R31 R32 R34 R36 R37 R39 R40: library part "Res 1.0K 60mW 1% 0402", "Resistor 1.0K 60mW 1% 0402 ThickFilm"
R24 R33: library part "Res 2.21K 60mW 1% 0402", "Resistor 2.21K 60mW 1% 0402 ThickFilm"
R26 R28 R29 R30: library part "Res 10K 60mW 1% 0402", "Resistor 10K 60mW 1% 0402 ThickFilm"
R41: library part "Res 12.4k 60mW 0.1% 0402", "Resistor 12.4k 60mW 0.1% 0402 ThickFilm"
U1: library part "IC FPGA MAX10"
U2: library part "IC MRAM 64kx16bit 3p3V TSOP44", "IC MRAM 64kx16bit 3p3V TSOP44"
U3: library part "IC LTM4622 IC uModule Buck Reg Dual LGA25", "IC uModule Buck Reg Dual LGA25"
U4: library part "IC LDO 2.5V 100mA DFN-8_1", "IC LDO 2.5V 100mA DFN-8"
U5: library part "IC LDO 1.2V 100mA DFN-8", "IC LDO 1.2V 100mA DFN-8"
U6: library part "IC LT3065-adj LDO 500mA", "LT3065-adj LDO 500mA"
U7: library part "Oss 50Mz 50ppm SMT", "Oss 50MHz 50ppm SMT"
U8 U10: library part "IC OP AMP DUAL LTC6014CDD DFN8", "IC OP AMP Dual LTC6014 DFN8"
U9: library part "IC 93LC46BTEOT EEPROM", "IC EEPROM Serial  SOT23 6Pin"
U11: library part "Oss 12MHz 50ppm SMT_1", "Oss 12MHz 50ppm SMT"
U12: library part "Reg 1p24V Precision Adj Shunt SPX432", "IC, Reg 1.24V Precision Adj Shunt SOT23 SPX432"
U13: "Dual High Speed USB To Multipurpose UART/FIFO IC, 64-pin LQFP, Tray"
USB1: library part "Conn USB A 4Pin TH RT", "Connector USB A 4Pin TH RT"

## Via types
v1: diameter 19.68, hole 7.87, Top Layer to Bottom Layer, 24 vias

## Nets (pads, with @x,y where several pads share a name; then routed paths per layer and width w, separated by ;. In a path a pad name is that pad's centre, name@x,y a point inside that pad or via, vN(x,y) a via of type N, cw(c..) or ccw(c..) an arc to the next point about the centre after c; other vN are vias at no path point)
1.2V: C14.1 L1.1 U5.3 U5.4
1.8V: C31.1 C32.1 C33.1 C47.1 U13.12 U13.37 U13.49 U13.64
2.5V: C7.1 L2.1 R35.1 U4.3 U4.4
3.3V: C1.1 C8.1 C12.1 C15.1 C22.1 C23.1 C24.1 C25.1 C34.1 C35.1 C36.1 C37.1 C38.1 C40.1 C41.1 C62.1 C64.1 C69.1 D3.1 J2.1 JTAG1.4 L3.1 LED1.1 LED1.2 LED1.3 LED2.1 LED2.2 LED2.3 LED3.1 LED3.2 LED3.3 PMOD1.6 PMOD1.12 PMOD2.6 PMOD2.12 PMOD3.6 PMOD3.12 R4.1 R24.1 R28.1 R29.1 R30.1 U2.11 U2.27 U2.33 U6.9 U6.10 U7.6 U8.8 U9.6 U10.8 U11.6 U13.4 U13.9 U13.20 U13.31 U13.42 U13.50 U13.56
3.3VEXT: C11.1 J2.3 U3.A1 U3.B1
3.3VEXT-B: C20.1 HD1.1 HD1.7 J2.2 J2.4
4.5V: C5.1 C6.1 C13.1 C21.1 D1.1 D2.1 U4.5 U4.6 U4.7 U5.5 U5.6 U5.7 U6.1 U6.2 U6.3
5V_USB: C45.1 D2.2 USB1.1
5VINT: C4.1 D1.2 U3.D1 U3.E1
AD1: C27.2 R15.2 U1.F5 U8.1
AD2: C46.2 R21.2 U1.F4 U8.7
AD3: C57.2 R27.2 U1.H5 U10.1
AD4: C70.2 R36.2 U1.G5 U10.7
EN: JTAG1.8 U1.G6
GND: C1.2 C2.2 C3.2 C4.2 C5.2 C6.2 C7.2 C8.2 C9.2 C10.2 C11.2 C12.2 C13.2 C14.2 C15.2 C16.2 C17.2 C18.2 C19.2 C20.2 C21.2 C22.2 C24.2 C25.2 C26.2 C28.2 C29.2 C30.2 C31.2 C32.2 C33.2 C34.2 C35.2 C36.2 C37.2 C38.2 C40.2 C41.2 C42.2 C43.2 C44.2 C45.2 C47.2 C48.2 C49.2 C50.2 C51.2 C53.2 C54.2 C55.2 C56.2 C58.2 C59.2 C60.2 C61.2 C62.2 C64.2 C65.2 C66.2 C67.2 C68.2 C69.2 HD1.2 HD1.8 J1.2 J1.3 JTAG1.2 JTAG1.10 PMOD1.5 PMOD1.11 PMOD2.5 PMOD2.11 PMOD3.5 PMOD3.11 R1.2 R2.2 R3.2 R8.1 R9.2 R11.2 R26.1 R41.2 U1.A1 U1.A16 U1.B14 U1.C8 U1.C11 U1.D3 U1.D6 U1.E2 U1.E6 U1.E13 U1.F15 U1.G3 U1.G8 U1.G10 U1.H7 U1.H14 U1.J10 U1.K1 U1.K3 U1.K7 U1.K9 U1.K16 U1.L14 U1.M4 U1.N9 U1.N12 U1.N15 U1.P3 U1.P7 U1.R13 U1.T1 U1.T10 U1.T16 U2.12 U2.26 U2.34 U3.B5 U3.C1 U3.C2 U3.C5 U3.D5 U4.8 U4.9 U5.8 U5.9 U6.4 U6.7 U6.11 U7.3 U8.4 U9.2 U10.4 U11.3 U12.3 U13.1 U13.5 U13.10 U13.11 U13.15 U13.25 U13.35 U13.47 U13.51 USB1.4 USB1.G1 USB1.G2
LED1_B: R5.2 U1.C13
LED1_G: R7.2 U1.C12
LED1_R: R6.2 U1.E11
LED2_B: R10.2 U1.F11
LED2_G: R13.2 U1.F10
LED2_R: R12.2 U1.F12
LED3_B: R14.2 U1.E10
LED3_G: R18.2 U1.A13
LED3_R: R16.2 U1.B13
MRAM_A0: U1.D9 U2.1
MRAM_A1: U1.C9 U2.2
MRAM_A2: U1.F9 U2.3
MRAM_A3: U1.E9 U2.4
MRAM_A4: U1.B12 U2.5
MRAM_A5: U1.B11 U2.18
MRAM_A6: U1.C10 U2.19
MRAM_A7: U1.B10 U2.20
MRAM_A8: U1.A11 U2.21
MRAM_A9: U1.A12 U2.22
MRAM_A10: U1.B8 U2.23
MRAM_A11: U1.B7 U2.24
MRAM_A12: U1.B9 U2.25
MRAM_A13: U1.A8 U2.42
MRAM_A14: U1.B6 U2.43
MRAM_A15: U1.C6 U2.44
MRAM_DQL0: U1.J11 U2.7
MRAM_DQL1: U1.J12 U2.8
MRAM_DQL2: U1.J14 U2.9
MRAM_DQL3: U1.K15 U2.10
MRAM_DQL4: U1.J15 U2.13
MRAM_DQL5: U1.J16 U2.14
MRAM_DQL6: U1.H15 U2.15
MRAM_DQL7: U1.H16 U2.16
MRAM_DQU8: U1.D16 U2.29
MRAM_DQU9: U1.C16 U2.30
MRAM_DQU10: U1.H11 U2.31
MRAM_DQU11: U1.H12 U2.32
MRAM_DQU12: U1.G14 U2.35
MRAM_DQU13: U1.G15 U2.36
MRAM_DQU14: U1.G16 U2.37
MRAM_DQU15: U1.F16 U2.38
MRAM_E: U1.A6 U2.6
MRAM_G: U1.C5 U2.41
MRAM_LB: U1.A5 U2.39
MRAM_UB: U1.F7 U2.40
MRAM_W: U1.B5 U2.17
NetC9_1: C9.1 U4.1
NetC10_1: C10.1 U4.2
NetC16_1: C16.1 U3.E3
NetC17_1: C17.1 U5.1
NetC18_1: C18.1 U3.A3
NetC19_1: C19.1 U5.2
NetC23_2: C23.2 R4.2 R9.1 U6.8
NetC26_1: C26.1 U6.6
NetC27_1: C27.1 R15.1 R17.2 U8.2
NetC28_1: C28.1 C29.1 C30.1 C42.1 C43.1 C44.1 L1.2 U1.D13 U1.F6 U1.G7 U1.G9 U1.H8 U1.H9 U1.H10 U1.J7 U1.J8 U1.J9 U1.K8 U1.K10 U1.M5
NetC39_1: C39.1 R19.2 R20.1 U8.3
NetC46_1: C46.1 R21.1 R22.2 U8.6
NetC48_1: C48.1 C49.1 C50.1 C51.1 L2.2 U1.D5 U1.E5 U1.E12 U1.L5 U1.M12
NetC52_1: C52.1 R23.2 R25.1 U8.5
NetC53_1: C53.1 C54.1 C55.1 C56.1 C58.1 C59.1 C60.1 C61.1 C65.1 C66.1 C67.1 C68.1 L3.2 U1.C7 U1.D7 U1.D8 U1.D10 U1.D11 U1.F13 U1.G4 U1.G13 U1.H4 U1.H13 U1.J4 U1.J13 U1.K4 U1.K13 U1.L4 U1.L13 U1.M13 U1.N6 U1.N7 U1.N8 U1.N10 U1.N11
NetC57_1: C57.1 R27.1 R31.2 U10.2
NetC63_1: C63.1 R32.2 R34.1 U10.3
NetC70_1: C70.1 R36.1 R37.2 U10.6
NetC71_1: C71.1 R39.2 R40.1 U10.5
NetD3_2: D3.2 R8.2
NetLED1_4: LED1.4 R7.1
NetLED1_5: LED1.5 R6.1
NetLED1_6: LED1.6 R5.1
NetLED2_4: LED2.4 R13.1
NetLED2_5: LED2.5 R12.1
NetLED2_6: LED2.6 R10.1
NetLED3_4: LED3.4 R18.1
NetLED3_5: LED3.5 R16.1
NetLED3_6: LED3.6 R14.1
NetR1_1: R1.1 U3.C4
NetR2_1: R2.1 U3.A4
NetR3_1: R3.1 U3.E4
NetR11_1: R11.1 U6.5
NetR24_2: R24.2 U13.14
NetR26_2: R26.2 U13.6
NetR28_2: R28.2 U9.5 U13.63
NetR29_2: R29.2 U9.4 U13.62
NetR30_2: R30.2 R33.1 U9.3 U13.61
NetR33_2: R33.2 U9.1
NetR35_2: R35.2 R38.1 U1.E4 U12.2
NetR38_2: R38.2 R41.1 U12.1
NetU1_K6: U1.K6 U1.L3 U7.4
NetU11_4: U11.4 U13.2
PMOD1-1: PMOD1.1 U1.P14
PMOD1-2: PMOD1.2 U1.R14
PMOD1-3: PMOD1.3 U1.T14
PMOD1-4: PMOD1.4 U1.T15
PMOD1-7: PMOD1.7 U1.L11
PMOD1-8: PMOD1.8 U1.L12
PMOD1-9: PMOD1.9 U1.N14
PMOD1-10: PMOD1.10 U1.P15
PMOD2-1: PMOD2.1 U1.N5
PMOD2-2: PMOD2.2 U1.P4
PMOD2-3: PMOD2.3 U1.R1
PMOD2-4: PMOD2.4 U1.P2
PMOD2-7: PMOD2.7 U1.L7
PMOD2-8: PMOD2.8 U1.M6
PMOD2-9: PMOD2.9 U1.R2
PMOD2-10: PMOD2.10 U1.R3
PMOD3-1: PMOD3.1 U1.R6
PMOD3-2: PMOD3.2 U1.T4
PMOD3-3: PMOD3.3 U1.T5
PMOD3-4: PMOD3.4 U1.L8
PMOD3-7: PMOD3.7 U1.M7
PMOD3-8: PMOD3.8 U1.P6
PMOD3-9: PMOD3.9 U1.R7
PMOD3-10: PMOD3.10 U1.R8
RTN1: HD1.3 R17.1
RTN2: HD1.5 R22.1
RTN3: HD1.9 R31.1
RTN4: HD1.11 R37.1
RX1: U1.P11 U13.16
RX2: U1.L9 U13.38
TCK: JTAG1.1 U1.H3
TDI: JTAG1.9 U1.G1
TDO: JTAG1.3 U1.H1
TMS: JTAG1.5 U1.H2
TX1: U1.P10 U13.17
TX2: U1.M10 U13.39
USB_N: U13.7 USB1.2
USB_P: U13.8 USB1.3
VBUSS: C2.1 C3.1 J1.1 U3.A2 U3.B2 U3.B3 U3.D2 U3.D3 U3.E2
VIN1: HD1.4 R19.1
VIN2: HD1.6 R23.1
VIN3: HD1.10 R32.1
VIN4: HD1.12 R39.1
VREF_ID1: C39.2 R20.2
VREF_ID2: C52.2 R25.2
VREF_ID3: C63.2 R34.2
VREF_ID4: C71.2 R40.2
pads on no net: HD1.13 HD1.14 HD1.15 HD1.16 JTAG1.6 JTAG1.7 U1.A2 U1.A3 U1.A4 U1.A7 U1.A9 U1.A10 U1.A14 U1.A15 U1.B1 U1.B2 U1.B3 U1.B4 U1.B15 U1.B16 U1.C1 U1.C2 U1.C3 U1.C4 U1.C14 U1.C15 U1.D1 U1.D2 U1.D4 U1.D12 U1.D14 U1.D15 U1.E1 U1.E3 U1.E7 U1.E8 U1.E14 U1.E15 U1.E16 U1.F1 U1.F2 U1.F3 U1.F8 U1.F14 U1.G2 U1.G11 U1.G12 U1.H6 U1.J1 U1.J2 U1.J3 U1.J5 U1.J6 U1.K2 U1.K5 U1.K11 U1.K12 U1.K14 U1.L1 U1.L2 U1.L6 U1.L10 U1.L15 U1.L16 U1.M1 U1.M2 U1.M3 U1.M8 U1.M9 U1.M11 U1.M14 U1.M15 U1.M16 U1.N1 U1.N2 U1.N3 U1.N4 U1.N13 U1.N16 U1.P1 U1.P5 U1.P8 U1.P9 U1.P12 U1.P13 U1.P16 U1.R4 U1.R5 U1.R9 U1.R10 U1.R11 U1.R12 U1.R15 U1.R16 U1.T2 U1.T3 U1.T6 U1.T7 U1.T8 U1.T9 U1.T11 U1.T12 U1.T13 U2.28 U3.A5 U3.B4 U3.C3 U3.D4 U3.E5 U7.1 U7.2 U7.5 U7.7 U8.9 U10.9 U11.1 U11.2 U11.5 U11.7 U13.3 U13.13 U13.18 U13.19 U13.21 U13.22 U13.23 U13.24 U13.26 U13.27 U13.28 U13.29 U13.30 U13.32 U13.33 U13.34 U13.36 U13.40 U13.41 U13.43 U13.44 U13.45 U13.46 U13.48 U13.52 U13.53 U13.54 U13.55 U13.57 U13.58 U13.59 U13.60 USB1.0
copper on no net:
  other v1: 2490.31,710.63 2529.68,710.63 2490.31,750 2529.68,750 2490.31,789.37 2529.68,789.37 4280.63,1320.31 4320,1320.31 4359.37,1320.31 4280.63,1359.68 4320,1359.68 4359.37,1359.68 1244.25,4049.49 1275.75,4049.49 1964.25,4049.49 1995.75,4049.49 1244.25,4080 1275.75,4080 1964.25,4080 1995.75,4080 1244.25,4110.51 1275.75,4110.51 1964.25,4110.51 1995.75,4110.51

## Polygon pours and split planes (outlines as drawn)
no net on Internal Plane 1 (split plane): 3973.05,2479.9 4979.9,2036.89 4979.9,1413.61 3996.13,1020.1 1020.1,1020.1 1020.1,2479.9
no net on Internal Plane 2 (split plane): 3973.05,2479.9 4979.9,2036.89 4979.9,1413.61 3996.13,1020.1 1020.1,1020.1 1020.1,2479.9

## Text inside footprints (layer, text, board x,y; h text height)
HD1: Top Overlay "o" at 1177.36,2427.64 h60 r180; Mechanical 1 "o" at 1200,2430 h60 r180
J2: Top Overlay "*" at 1310,2750 h60 r180
PMOD1: Mechanical 1 "o" at 1200,1300 h60 r180
PMOD2: Mechanical 1 "o" at 1200,1700 h60 r180
PMOD3: Mechanical 1 "o" at 1200,2100 h60 r180
U3: Top Overlay "o" at 2955.47,3301.06 h39.37; Mechanical 15 "*" at 2918.9,3309.92 h60